# Altium PCB K10P100最小系统V1.0.PcbDoc (part 1 of 2)
Units mm, origin at the board's own origin, x right, y up, seen from the top; angles counter-clockwise.
Board outline 152.4 x 101.6 mm, 2 copper layers (Top Layer, Bottom Layer); 129 components, 121 nets, 483 pads, 257 vias.
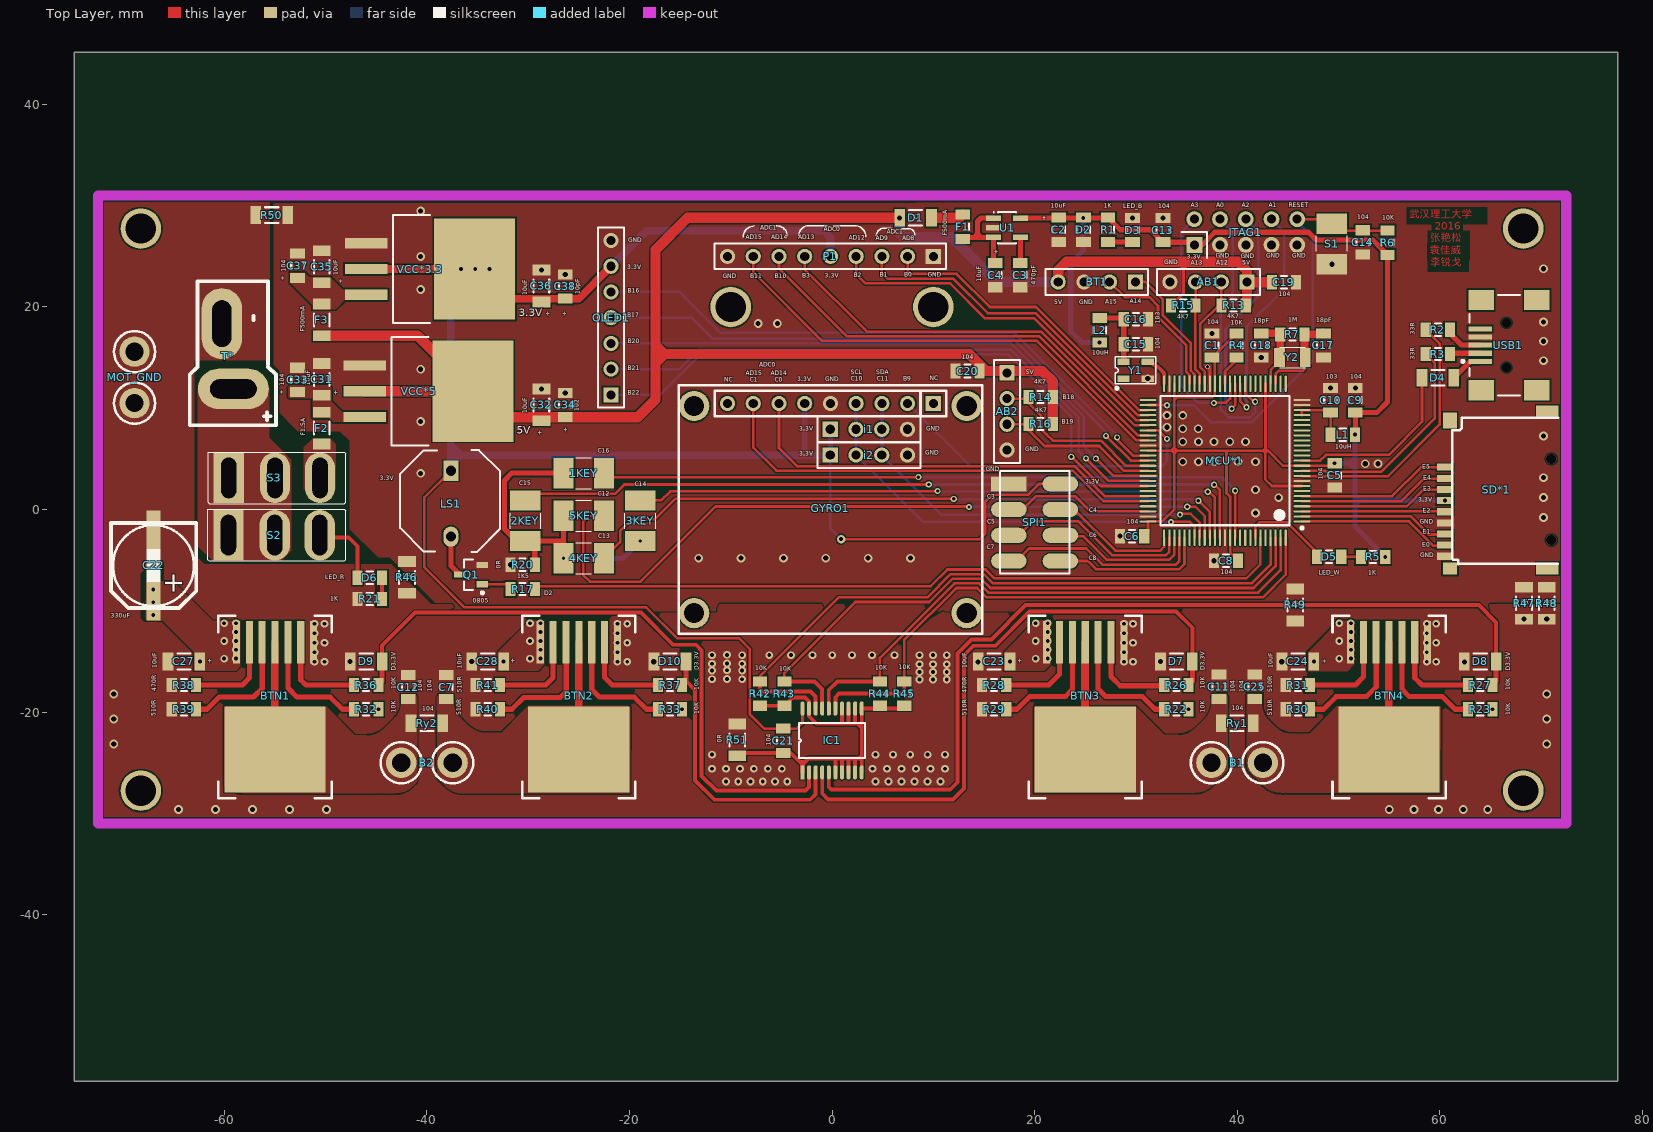
[diagram p0: Top Layer view]
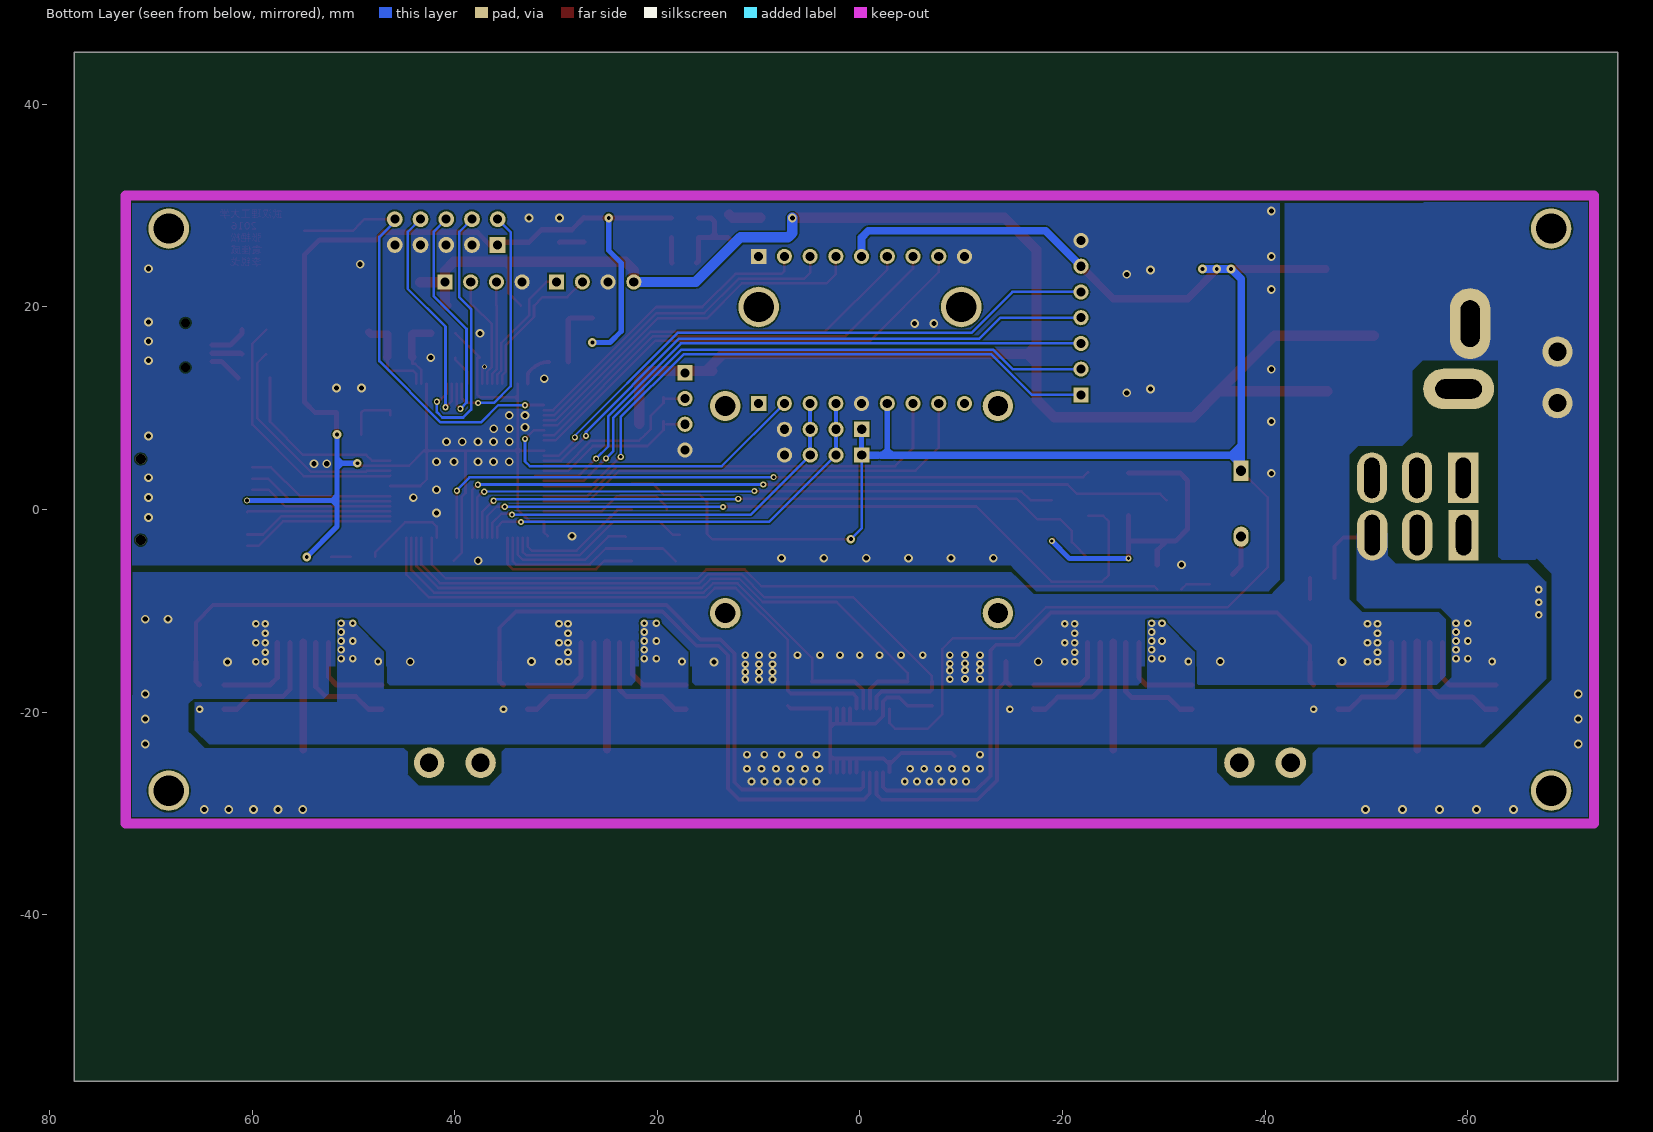
[diagram p1: Bottom Layer view, seen from below]

## Layer stack, top to bottom
Top Layer: signal copper 0.0356
Dielectric: dielectric 0.32, FR-4, Dk 4.8
Bottom Layer: signal copper 0.0356

## Board outline
-74.823,-56.45 77.577,-56.45 77.577,45.15 -74.823,45.15

## Design rules (kind name [scope] priority, off if disabled: settings)
Clearance Clearance_1 [All] p1: gap=0.152
Clearance [InNet('EGND')] p2: gap=0.381
PolygonConnect [All] p1: connectstyle=Direct reliefconductorwidth=0.254 reliefentries=4 polygonreliefangle="90 Angle" airgapwidth=0.254
RoutingVias [All] p1: holewidth=0.711 width=1.27 viastyle="Through Hole" minholewidth=0.711 minwidth=1.27 maxholewidth=0.711 maxwidth=1.27
SolderMaskExpansion [All] p1: expansion=0.102
Width [All] p1: maxlimit=1.27 minlimit=0.152 preferedwidth=0.508 minimp=50.000000 maximp=50.000000 favimp=50.000000
28 further rules are at their usual default settings.

## Classes and differential pairs
component class K10P100最小系统V1.0: C1 C2 C3 C4 C5 C6 C8 C9 C10 C13 C14 C15 C16 C17 C18 D1 D2 D3 D4 D5 F1 JTAG1 L1 L2 MCU*1 R1 R2 R3 R4 R5 R6 R7 S1 U1 USB1 Y1 Y2
component class 其他外设: 1KEY 2KEY 3KEY 4KEY 5KEY AB1 AB2 BT1 C19 C20 C21 GYRO1 i1 i2 IC1 LS1 OLED1 P1 Q1 R13 R14 R15 R16 R17 R20 R42 R43 R44 R45 R51 SD*1 SPI1 U3
component class 电机驱动: B1 B2 BTN1 BTN2 BTN3 BTN4 C7 C11 C12 C22 C23 C24 C25 C27 C28 D6 D7 D8 D9 D10 IC5 MOT_GND R21 R22 R23 R26 R27 R28 R29 R30 R31 R32 R33 R36 R37 R38 R39 R40 R41 Ry1 Ry2 S2
component class 电源: C31 C32 C33 C34 C35 C36 C37 C38 F2 F3 R46 R47 R48 R49 R50 S3 T* VCC*2 VCC*3.3 VCC*5

## Components (designator, comment, footprint, x,y, rotation, side; value= is the part's Value field where it differs from the comment)
1KEY "SW-PB" "sw 3*4 *2" -22.525,5.125 r180 top
2KEY "SW-PB" "sw 3*4 *2" -31.8,0.9 r270 top
3KEY "SW-PB" "sw 3*4 *2" -20.475,0.9 r270 top
4KEY "SW-PB" "sw 3*4 *2" -22.525,-3.3 r180 top
5KEY "SW-PB" "sw 3*4 *2" -22.525,0.913 r180 top
AB1 "Header 4" HDR1X4 40.975,22.475 r180 top
AB2 "Header 4" HDR1X4 17.275,13.5 r270 top
B1 "Motor" KF301-2P 40,-25 r0 top
B2 "Motor" KF301-2P -40,-25 r0 top
BT1 "Header 4" HDR1X4 29.95,22.475 r180 top
BTN1 "BTN7960" PG-TO263-7-1 -55,-12 r180 top
BTN2 "BTN7960" PG-TO263-7-1 -25,-12 r180 top
BTN3 "BTN7960" PG-TO263-7-1 25,-12 r180 top
BTN4 "BTN7960" PG-TO263-7-1 55,-12 r180 top
C1 "100nF" C2012 37.525,16.2 r270 top
C2 "Cap Pol1" C2012 22.375,27.625 r270 top
C3 "470pF" C2012 18.575,23.15 r90 top
C4 "10UF" C2012 16.125,23.15 r90 top
C5 "100nF" C2012 49.625,3.375 r90 top
C6 "100nF" C2012 29.625,-2.625 r0 top
C7 "Cap" C2012 -38.1,-17.525 r90 top
C8 "100nF" C2012 38.9,-5.05 r0 top
C9 "100nF" C2012 51.675,10.8 r270 top
C10 "10nF" C2012 49.225,10.8 r270 top
C11 "Cap" C2012 38.2,-17.5 r90 top
C12 "Cap" C2012 -41.85,-17.525 r90 top
C13 "100nF" C2012 32.675,27.6 r90 top
C14 "100nF" C2012 52.4,26.375 r90 top
C15 "10nF" C2012 30,16.325 r180 top
C16 "100nF" C2012 30,18.775 r180 top
C17 "18pF" C2012 48.525,16.2 r90 top
C18 "18pF" C2012 42.375,16.2 r90 top
C19 "100nF" C2012 44.625,22.45 r0 top
C20 "100nF" C2012 13.375,13.675 r180 top
C21 "100nF" C2012 -4.825,-22.825 r270 top
C22 "Cap Pol1" SMD-EC-F8 -67,-9.05 r90 top
C23 "Cap Pol1" 1206(2) 16,-15 r180 top
C24 "Cap Pol1" 1206(2) 46,-15 r180 top
C25 "Cap" C2012 41.75,-17.5 r270 top
C27 "Cap Pol1" 1206(2) -64,-15 r180 top
C28 "Cap Pol1" 1206(2) -34,-15 r180 top
C31 "Cap Pol1" 1206(2) -50.4,12.85 r90 top
C32 "Cap Pol1" 1206(2) -28.7,10.325 r90 top
C33 "Cap" C2012 -52.775,12.8 r270 top
C34 "Cap" C2012 -26.35,10.325 r270 top
C35 "Cap Pol1" 1206(2) -50.4,23.975 r90 top
C36 "Cap Pol1" 1206(2) -28.7,22.075 r90 top
C37 "Cap" C2012 -52.775,24.075 r270 top
C38 "Cap" C2012 -26.35,22.025 r270 top
D1 "Diode" 1206(2) 8.25,28.8 r0 top
D2 "1N4729A" C2012 24.825,27.625 r90 top
D3 "POWER" C2012 29.675,27.6 r90 top
D4 "Diode" 1206(2) 59.83,13.006 r180 top
D5 "POWER" C2012 49.075,-4.675 r180 top
D6 "LED" C2012 -45.65,-6.75 r0 top
D7 "1SS355" 1206(2) 34,-15 r0 top
D8 "1SS355" 1206(2) 64,-15 r0 top
D9 "1SS355" 1206(2) -46,-15 r0 top
D10 "1SS355" 1206(2) -16,-15 r0 top
F1 "300mA" R2012 12.9,27.925 r90 top
F2 "1.5A" 1206(2) -50.4,8.05 r90 top
F3 "500mA" 1206(2) -50.4,18.725 r90 top
GYRO1 "陀螺仪" landzo_AngularRate_Accelerometer_Sensor 10,10.475 r180 top
i1 "Header 4" HDR1X4 -0.175,7.925 r0 top
i2 "Header 4" HDR1X4 -0.175,5.375 r0 top
IC1 "74LVC245" "TSSOP20 74lvc245" 0,-22.775 r90 top
JTAG1 "Header 5X2" IDC5X2 40.85,27.4 r0 top
L1 "Inductor" C2012 50.425,7.4 r180 top
L2 "Inductor" C2012 26.425,17.7 r90 top
LS1 "Buzzer" ABSM-1574 -37.4,6.475 r270 top
MCU*1 "k60P100" LQFP100 38.8,4.825 r180 top
MOT_GND "Motor" KF301-2P -68.875,13.05 r90 top
OLED1 "Header 7" HDR1X7 -21.825,11.325 r90 top
P1 "Header 9" HDR1X9 10,25 r180 top
Q1 "QNPN" SOT95P240-3N -35.65,-6.425 r180 top
R1 "1K" R2012 27.25,27.625 r90 top
R2 "33R" R2012 59.825,17.75 r180 top
R3 "33R" R2012 59.825,15.35 r180 top
R4 "10K" R2012 39.95,16.2 r270 top
R5 "1K" R2012 53.425,-4.675 r0 top
R6 "10K" R2012 54.85,26.35 r270 top
R7 "1M" R2012 45.45,17.3 r180 top
R13 "Res2" R2012 39.65,20.15 r0 top
R14 "Res2" R2012 20.6,11.1 r0 top
R15 "Res2" R2012 34.675,20.15 r180 top
R16 "Res2" R2012 20.6,8.45 r0 top
R17 "Res2" R2012 -30.55,-7.85 r0 top
R20 "0R" R2012 -30.55,-5.45 r0 top
R21 "Res2" R2012 -45.65,-8.825 r0 top
R22 "Res2" R2012 34,-19.725 r0 top
R23 "Res2" R2012 64,-19.725 r180 top
R26 "Res2" R2012 34,-17.325 r180 top
R27 "Res2" R2012 64,-17.325 r0 top
R28 "Res2" R2012 16,-17.325 r0 top
R29 "Res2" R2012 16,-19.725 r0 top
R30 "Res2" R2012 46,-19.725 r0 top
R31 "Res2" R2012 46,-17.325 r0 top
R32 "Res2" R2012 -46,-19.725 r0 top
R33 "Res2" R2012 -16,-19.725 r180 top
R36 "Res2" R2012 -46,-17.325 r180 top
R37 "Res2" R2012 -16,-17.325 r0 top
R38 "Res2" R2012 -64,-17.325 r0 top
R39 "Res2" R2012 -64,-19.725 r0 top
R40 "Res2" R2012 -34,-19.725 r0 top
R41 "Res2" R2012 -34,-17.325 r0 top
R42 "Res2" R2012 -7.1,-18.175 r270 top
R43 "Res2" R2012 -4.7,-18.175 r270 top
R44 "Res2" R2012 4.725,-18.175 r270 top
R45 "Res2" R2012 7.125,-18.175 r270 top
R46 "Res2" 1206(2) -41.975,-6.7 r270 top
R47 "Res2" 1206(2) 68.325,-9.25 r270 top
R48 "Res2" 1206(2) 70.575,-9.25 r270 top
R49 "Res2" 1206(2) 45.75,-9.425 r270 top
R50 "Res2" 1206(2) -55.325,29.075 r180 top
R51 "Res2" 1206(2) -9.35,-22.75 r270 top
Ry1 "" 1206(2) 40,-21.1 r0 top
Ry2 "" 1206(2) -40,-21.1 r0 top
S1 "SW-PB" "sw 3*4 *2" 50.875,24.225 r90 top
S2 "SW-SPST" SW-125V6A(-) -59.6,-2.525 r0 top
S3 "SW-SPST" SW-125V6A(-) -59.575,3.125 r0 top
SD*1 "TF_card" SD_card 69.25,0.025 r180 top
SPI1 "Header 4X2A" "SMT head4*1" 20.125,-1.4 r0 top
T* "T头" T插 -59.525,17.075 r270 top
U1 "MIC5219" SOT-23-5 17.275,27.825 r270 top
USB1 "USB-MINI-B" USB-MINI-B 71.841,16.234 r0 top
VCC*3.3 "LM1086" "DPAK LM2940" -39.7,23.75 r0 top
VCC*5 "LM1084" "DPAK LM2940" -39.85,11.675 r0 top
Y1 "50MHZ" XTAL7_3225 29.975,13.75 r0 top
Y2 "32.768K" CT3215 46.725,15.025 r180 top

## Footprints (in the part's own frame and the unit in brackets; to place one, negate y for a bottom-side part, rotate by r counter-clockwise, add the part's x,y. Pads: shape width x height; smd on the part's side, far side on the other; paste and mask are expansions set on the pad)
1206(2) [mm]
  rect 1.05x1.75 smd: 1(-1.575,0) 2(1.575,0)
  silkscreen extent -0.65,-0.77 0.65,0.77, body extent -1.6,-0.8 1.6,0.8, height 1.6
ABSM-1574 [mm] "Magnetic Transducer Buzzer"
  rect 2x1.5 hole 1: 1A(2.65,-0.24)
  oval 2x1.5 hole 1: 2A(9.15,-0.24)
  silkscreen extent 0.6,-5.25 10.68,4.62
C2012 [mm] "Chip Capacitor, 2-Leads, Body 2.0x1.2mm, IPC Low Density"
  rect 1x1.45 smd: 1(-1.2,0) 2(1.2,0)
  silkscreen extent -0.3,-0.63 0.3,0.63, body extent -0.98,-0.6 1.02,0.6, height 0.5
CT3215 [mm]
  rect 1.05x1.85 smd: 1(0,0) 2(2.54,0)
  silkscreen extent 0,-1.02 2.54,1.02
"DPAK LM2940" [mm] "D2-PAK, 4-Pads, Body 7.93x8.69mm (max), IPC Medium Density"
  rect 4.2x1 smd: 1(-6.3,2.54) 2(-6.3,0) 3(-6.3,-2.54)
  rect 8x10 smd: 4(4.4,0)
  silkscreen extent -3.65,-5.35 0,5.35, body extent -3.65,-5.33 6,5.33, height 4.83
HDR1X4 [mm] "Connector; Header; 4 Position"
  rect 1.5x1.5 hole 0.9: 1(0,0)
  round 1.5 hole 0.9: 2(2.54,0) 3(5.08,0) 4(7.62,0)
  silkscreen extent -1.27,-1.27 8.89,1.27
HDR1X7 [mm] "Connector; Header; 7 Position"
  rect 1.5x1.5 hole 0.9: 1(0,0)
  round 1.5 hole 0.9: 2(2.54,0) 3(5.08,0) 4(7.62,0) 5(10.16,0) 6(12.7,0) 7(15.24,0)
  silkscreen extent -1.27,-1.27 16.51,1.27
HDR1X9 [mm] "Connector; Header; 9 Position"
  rect 1.5x1.5 hole 0.9: 1(0,0)
  round 1.5 hole 0.9: 2(2.54,0) 3(5.08,0) 4(7.62,0) 5(10.16,0) 6(12.7,0) 7(15.24,0) 8(17.78,0) 9(20.32,0)
  silkscreen extent -1.27,-1.27 21.59,1.27, body extent -1.27,-1.27 21.59,1.27, height 7.58
IDC5X2 [mil]
  rect 62x62 hole 35: 1(-200,-50)
  round 62 hole 35: 2(-200,50) 3(-100,-50) 4(-100,50) 5(0,-50) 6(0,50) 7(100,-50) 8(100,50) 9(200,-50) 10(200,50)
  silkscreen extent -250,-100 -150,0
KF301-2P [mm]
  round 3 hole 1.8: 1(-2.54,0) 2(2.54,0)
  silkscreen extent -4.57,-2.03 4.57,2.03
landzo_AngularRate_Accelerometer_Sensor [mm]
  round 3 hole 2: 0(-3.302,20.701) 0(-3.302,0.254) 0(23.622,20.701) 0(23.622,0.254)
  rect 1.5x1.5 hole 0.9: 1(0,0)
  round 1.5 hole 0.9: 2(2.54,0) 3(5.08,0) 4(7.62,0) 5(10.16,0) 6(12.7,0) 7(15.24,0) 8(17.78,0) 9(20.32,0)
  silkscreen extent -4.83,-1.78 25.15,22.73
LQFP100 [mm] "SQFP, 100-Leads, Body 14.00x14.00mm, Pitch 0.50mm, IPC Medium Density"
  oval 1.65x0.2 smd: 1(-7.6,6) 2(-7.6,5.5) 3(-7.6,5) 4(-7.6,4.5) 5(-7.6,4) 6(-7.6,3.5) 7(-7.6,3) 8(-7.6,2.5) 9(-7.6,2) 10(-7.6,1.5) 11(-7.6,1) 12(-7.6,0.5) 13(-7.6,0) 14(-7.6,-0.5) 15(-7.6,-1) 16(-7.6,-1.5) 17(-7.6,-2) 18(-7.6,-2.5) 19(-7.6,-3) 20(-7.6,-3.5) 21(-7.6,-4) 22(-7.6,-4.5) 23(-7.6,-5) 24(-7.6,-5.5) 25(-7.6,-6) 51(7.6,-6) 52(7.6,-5.5) 53(7.6,-5) 54(7.6,-4.5) 55(7.6,-4) 56(7.6,-3.5) 57(7.6,-3) 58(7.6,-2.5) 59(7.6,-2) 60(7.6,-1.5) 61(7.6,-1) 62(7.6,-0.5) 63(7.6,0) 64(7.6,0.5) 65(7.6,1) 66(7.6,1.5) 67(7.6,2) 68(7.6,2.5) 69(7.6,3) 70(7.6,3.5) 71(7.6,4) 72(7.6,4.5) 73(7.6,5) 74(7.6,5.5) 75(7.6,6)
  oval 0.2x1.65 smd: 26(-6,-7.6) 27(-5.5,-7.6) 28(-5,-7.6) 29(-4.5,-7.6) 30(-4,-7.6) 31(-3.5,-7.6) 32(-3,-7.6) 33(-2.5,-7.6) 34(-2,-7.6) 35(-1.5,-7.6) 36(-1,-7.6) 37(-0.5,-7.6) 38(0,-7.6) 39(0.5,-7.6) 40(1,-7.6) 41(1.5,-7.6) 42(2,-7.6) 43(2.5,-7.6) 44(3,-7.6) 45(3.5,-7.6) 46(4,-7.6) 47(4.5,-7.6) 48(5,-7.6) 49(5.5,-7.6) 50(6,-7.6) 76(6,7.6) 77(5.5,7.6) 78(5,7.6) 79(4.5,7.6) 80(4,7.6) 81(3.5,7.6) 82(3,7.6) 83(2.5,7.6) 84(2,7.6) 85(1.5,7.6) 86(1,7.6) 87(0.5,7.6) 88(0,7.6) 89(-0.5,7.6) 90(-1,7.6) 91(-1.5,7.6) 92(-2,7.6) 93(-2.5,7.6) 94(-3,7.6) 95(-3.5,7.6) 96(-4,7.6) 97(-4.5,7.6) 98(-5,7.6) 99(-5.5,7.6) 100(-6,7.6)
  silkscreen extent -7.73,-6.38 6.38,6.77, body extent -7,-7 7,7, height 1.7
PG-TO263-7-1 [mm]
  rect 0.7x4.2 smd: 1(-3.81,1.123) 2(-2.54,1.123) 3(-1.27,1.123) 4(0,1.123) 5(1.27,1.123) 6(2.54,1.123) 7(3.81,1.123)
  rect 10x8.5 smd: 8(0,11.684)
  silkscreen extent -5.59,-1.52 5.59,16.51
R2012 [mm] "Chip Resistor, 2-Leads, Body 2.0x1.2mm, IPC Low Density"
  rect 1x1.4 smd: 1(-1.2,0) 2(1.2,0)
  silkscreen extent -0.3,-0.6 0.3,0.6, body extent -0.98,-0.6 1.02,0.6, height 0.5
SD_card [mm]
  rect 1.6x0.7 smd: 1(8.732,-4.16) 2(8.732,-3.06) 3(8.732,-1.96) 4(8.732,-0.86) 5(8.732,0.24) 6(8.732,1.34) 7(8.732,2.44) 8(8.732,3.54) 9(8.732,4.64)
  rect 1.4x1.2 smd: 10(8.232,5.84)
  rect 2.2x1.2 smd: 11(-1.368,5.84) 12(-1.368,-9.66)
  rect 1.4x1.6 smd: 13(8.232,-8.76)
  silkscreen extent -2.47,-9.04 8.03,5.43
SMD-EC-F8 [mm]
  rect 3.8x1.4 smd: 1(0,0) 2(7.051,0)
  silkscreen extent -0.69,-4.22 7.71,4.2
"SMT head4*1" [mm]
  rect 3.5x1.5 smd: 1(-2.667,3.937)
  oval 3.5x1.5 smd: 2(-2.667,1.397) 3(-2.667,-1.143) 4(-2.667,-3.683) 5(2.413,3.937) 6(2.413,1.397) 7(2.413,-1.143) 8(2.413,-3.683)
  silkscreen extent -3.56,-4.93 3.3,5.23
SOT95P240-3N [mm] "SOT23, 3-Leads, Body 2.9x1.3mm, Pitch 0.95mm, Lead Span 2.4mm, IPC Medium Density"
  rect 1.15x0.6 smd: 1(-1.125,0.95) 2(-1.125,-0.95) 3(1.125,0)
  silkscreen extent -1.25,-1.5 0.7,1.92, body extent -0.7,-1.5 0.7,1.5, height 1.14
SOT-23-5 [mm] "SOT-23/SC-74A; 5 Leads; Body 3.1 x 3 mm, inc. leads (LxW max)"
  rect 0.55x1.45 smd: 1(-0.95,-1.329) 2(0,-1.329) 3(0.95,-1.329) 4(0.95,1.329) 5(-0.95,1.329)
  silkscreen extent -1.57,-1.35 1.55,0.9
"sw 3*4 *2" [mm]
  rect 2x3 smd: 1(0,1.524) 2(4,1.524)
  silkscreen extent 1.27,0 2.79,3.05
SW-125V6A(-) [mm]
  rect 3x5 hole 1.5 slot 4 at 90 deg: 0(0,0)
  oval 3x5 hole 1.5 slot 4 at 90 deg: 1(4.572,0) 2(9.017,0)
  silkscreen extent -2.03,-2.54 11.56,2.54
"TSSOP20 74lvc245" [mm]
  rect 1.4x0.4 smd: 1(-3.175,2.921)
  oval 1.4x0.4 smd: 2(-3.175,2.271) 3(-3.175,1.621) 4(-3.175,0.971) 5(-3.175,0.321) 6(-3.175,-0.329) 7(-3.175,-0.979) 8(-3.175,-1.629) 9(-3.175,-2.279) 10(-3.175,-2.929) 11(3.125,-2.929) 12(3.125,-2.279) 13(3.125,-1.629) 14(3.125,-0.979) 15(3.125,-0.329) 16(3.125,0.321) 17(3.125,0.971) 18(3.125,1.621) 19(3.125,2.271) 20(3.125,2.921)
  silkscreen extent -1.74,-3.25 1.69,3.25
T插 [mm]
  oval 4x7 hole 1.9 slot 4.6 at 90 deg: 1(5.161,0.416)
  oval 7x4 hole 1.9 slot 4.6 at 0 deg: 2(-1.283,-0.727)
  silkscreen extent -5.46,-3.9 8.75,4.61
USB-MINI-B [mm] "Connector; USB2.0, Type A, SM; 5 Position; Right Angle"
  rect 2.3x0.5 smd: 1(-7.85,-1.6) 2(-7.85,-0.8) 3(-7.85,0) 4(-7.85,0.8) 5(-7.85,1.6)
  rect 2.5x2 smd: 6(-7.75,4.45) 7(-2.25,4.45) 8(-7.75,-4.45) 9(-2.25,-4.45)
  round 0.6 hole 0.9 unplated: MH1(-5.25,2.2) MH2(-5.25,-2.2)
  silkscreen extent -9.67,-4.95 -3.9,4.95, body extent -8.55,-5.35 0.65,5.35, height 3.95
XTAL7_3225 [mil]
  rect 47.2x25.6 smd: 1(-47.25,-32.5) 2(47.25,-32.5) 3(47.25,32.5) 4(-47.25,32.5)
  silkscreen extent -79,-75 79,53

## Part data
1KEY 2KEY 3KEY 4KEY 5KEY S1: "Switch"
AB1 AB2 BT1 i1 i2: "Header, 4-Pin"
B1 B2 MOT_GND: "Motor, General Kind"
C1 C4 C5 C6 C8 C9 C10 C13 C14 C15 C16 C19 C20 C21: library part Cap, "Capacitor"
C2 C22 C23 C24 C27 C28 C31 C32 C35 C36: "Polarized Capacitor (Radial)"
C3 C17 C18: library part 陶瓷电容, "CAP"
C7 C11 C12 C25: "Capacitor"
C33 C34 C37 C38: "贴片电容"
D1 D4: "Default Diode"
D2 D7 D8 D9 D10: library part "Diode 1N4148", "High Conductance Fast Diode"
D3 D5: library part LED, "Typical INFRARED GaAs LED"
D6: "Typical INFRARED GaAs LED"
F1 F2 F3: library part "Fuse 1", "Fuse"
GYRO1: library part "Header 9", "Header, 8-Pin"
JTAG1: "Header, 5-Pin, Dual row"
LS1: "Magnetic Transducer Buzzer"
OLED1: "Header, 7-Pin"
P1: "Header, 9-Pin"
Q1: "NPN Bipolar Transistor"
R1 R4 R5 R20: library part Res, "Resistor of led"
R2 R3: library part Res, "贴片电阻"
R6 R7 Ry1 Ry2: library part Res, "Resistor"
R13 R14 R15 R16 R17 R21 R22 R23 R26 R27 R28 R29 R30 R31 R32 R33 R36 R37 R38 R39 R40 R41 R42 R43 R44 R45 R46 R47 R48 R49 R50 R51: "Resistor"
S2 S3: "Single-Pole, Single-Throw Switch"
SPI1: "Header, 4-Pin, Dual row"
T*: library part Tͷ
U1: "LDO"
USB1: "USB 2.0, Right Angle, SMT, A Type, Receptacle, 5 Position, Black"
VCC*5: library part LM1086
Y1: library part XTAL1
Y2: library part XTAL, "Crystal Oscillator"

## Free pads (board coordinates)
  round 4 hole 3: 0(68.25,-27.75) 1(-68.25,-27.75) 2(-68.25,27.75) 3(68.25,27.75) 4(-10,20) 5(10,20)

## Via types
v1: diameter 0.762, hole 0.381, Top Layer to Bottom Layer, 136 vias
v2: diameter 0.864, hole 0.508, Top Layer to Bottom Layer, 83 vias
v3: diameter 0.61, hole 0.33, Top Layer to Bottom Layer, 25 vias
v4: diameter 0.864, hole 0.381, Top Layer to Bottom Layer, 9 vias
v5: diameter 1, hole 1, Top Layer to Bottom Layer, 2 vias
v6: diameter 0.457, hole 0.3, Top Layer to Bottom Layer, 1 vias
v7: diameter 0.61, hole 0.381, Top Layer to Bottom Layer, 1 vias

## Nets (pads, with @x,y where several pads share a name; then routed paths per layer and width w, separated by ;. In a path a pad name is that pad's centre, name@x,y a point inside that pad or via, vN(x,y) a via of type N, cw(c..) or ccw(c..) an arc to the next point about the centre after c; other vN are vias at no path point)
3.3V: C21.1 C36.1 C38.2 GYRO1.6 i1.1 i2.1 IC1.20 LS1.1A OLED1.6 P1.5 SPI1.5 VCC*3.3.2 VCC*3.3.4 | length 219
  Top Layer w0.254: LS1.1A@-37.64,3.825 -40.25,1.215 -40.25,-5.7 -36.296,-9.654 -18.346,-9.654 -15.275,-12.725 -9.152,-12.725 -8.13,-13.746 -8.13,-20.205 -6.71,-21.625 C21.1@-4.825,-21.625 -3.45,-21.625 -2.921,-21.096 IC1.20@-2.921,-19.65 ; i2.1@-0.175,5.375 i2.1@-0.16,5.39 ; v4@0.925,-2.95 14.55,-2.95 15.1,-2.4 15.1,0.75 15.807,1.457 19.345,1.457 20.425,2.537 SPI1.5@22.538,2.537
  Top Layer w0.762: VCC*3.3.2@-46,23.75 v4(-36.65,23.75) VCC*3.3.4@-35.3,23.75 -32.375,20.825 C38.2@-26.35,20.825 -25.025,20.825 OLED1.6@-21.825,24.025
  Bottom Layer w0.254: -37.64,5.35 -37.615,5.375 ; i2.1@-0.175,5.375 -0.175,-1.85 v4(0.9,-2.925)
  Bottom Layer w0.508: -3.55,5.375 -3.275,5.375 -2.7,5.95 ; -2.725,5.375 -2.7,5.4 -2.7,5.95 ; GYRO1.6@-2.7,10.475 -2.7,5.95 ; -1.775,5.375 -2.125,5.375 -2.7,5.95 ; i2.1@-0.16,5.39 i1.1@-0.16,7.925
  Bottom Layer w0.762: LS1.1A@-37.64,3.825 LS1.1A@-37.64,4.41 ; -37.615,5.375 -36.675,5.375 ; v4(-33.825,23.75) v4(-35.238,23.75) v4(-36.65,23.75) -37.64,22.76 -37.64,6.25 ; OLED1.6@-21.825,24.025 -18.325,27.525 -0.825,27.525 -0.16,26.86 P1.5@-0.16,25 ; -3.55,5.375 -36.675,5.375 ; -3.275,5.375 -2.725,5.375 -2.125,5.375 ; -1.775,5.375 i2.1@-0.175,5.375 ; LS1.1A@-37.64,4.41 -37.64,5.35 -37.64,6.25 ; LS1.1A@-37.64,4.41 -36.675,5.375 ; -37.64,6.25 -37.55,6.25 -36.675,5.375
5V: AB1.1 AB2.1 BT1.4 C19.1 C20.1 C32.1 C34.2 D1.1 F3.1 R13.2 R14.2 R15.2 R16.2 VCC*5.2 VCC*5.4 | length 190.3
  Top Layer w0.254: R15.2@33.475,20.15 34.7,21.375 34.7,23.775 ; 34.4,24.575 34.4,24.475 ; 35.075,24.475 35.075,24.15 34.7,23.775 ; 34.4,24.475 34.4,24.075 34.7,23.775 ; 34.4,24.475 34.7,24.175 34.7,23.775
  Top Layer w1.016: F3.1@-50.725,17.15 -40.925,17.15 VCC*5.4@-35.45,11.675 ; VCC*5.2@-46.15,11.675 VCC*5.4@-35.45,11.675 ; v2(6.675,28.8) -14.275,28.8 -17.425,25.65 -17.425,16.2 ; C20.1@14.575,13.675 AB2.1@17.1,13.675 ; AB2.1@17.275,13.5 AB2.1@17.1,13.675 ; R16.2@21.8,8.45 R14.2@21.8,11.1 21.8,12.65 20.775,13.675 AB2.1@17.1,13.675 ; BT1.4@22.33,22.475 22.33,23.655 23.15,24.475 34.4,24.475 35.075,24.475 40.1,24.475 40.975,23.6 AB1.1@40.975,22.475 ; R13.2@40.85,20.15 40.975,20.275 AB1.1@40.975,22.475 ; C19.1@43.425,22.45 41,22.45 AB1.1@40.975,22.475 ; VCC*5.4@-35.45,11.675 -32.9,9.125 C34.2@-26.35,9.125 -19.2,9.125 -17.425,10.9 -17.425,14.5 ; -17.425,14.5 -17.425,15.35 ; -17.425,14.5 -16.575,15.35 ; -17.425,15.35 -16.575,15.35 ; -17.425,15.35 -17.425,16.2 ; -17.425,16.2 -16.575,15.35 ; -16.575,15.35 13.55,15.35 15.225,13.675 AB2.1@17.1,13.675
  Bottom Layer w1.016: v2(6.675,28.8) 6.675,27.3 7.1,26.875 11.8,26.875 16.2,22.475 BT1.4@22.33,22.475
"BT RXD": BT1.1 MCU*1.44 | length 13.1
  Top Layer w0.254: BT1.1@29.95,22.475 30.95,22.475 32.645,20.78 32.645,19.23 35.418,16.457 35.418,13.732 35.8,13.35 MCU*1.44@35.8,12.425
"BT TXD": BT1.2 MCU*1.45 | length 14.7
  Top Layer w0.254: BT1.2@27.41,22.475 28.91,20.975 31.325,20.975 32.188,20.112 32.188,19.012 34.961,16.239 34.961,13.615 35.3,13.275 MCU*1.45@35.3,12.425
CE: MCU*1.73 SPI1.2 | length 13.5
  Top Layer w0.254: SPI1.2@19.083,-0.003 19.083,0.283 20.125,1.325 24,1.325 25.5,-0.175 MCU*1.73@31.2,-0.175
DGND: 1KEY.2 2KEY.2 3KEY.2 4KEY.2 5KEY.2 R20.2 | length 33.6
  Top Layer w0.254: 2KEY.2@-31.126,-3.125 2KEY.2@-30.276,-3.125 ; 3KEY.2@-19.142,-2.909 v3(-18.951,-3.1)
  Top Layer w0.508: R20.2@-29.35,-5.45 -29.35,-4.026 2KEY.2@-30.276,-3.1 ; v3(-26.525,-4.824) -26.525,-3.15 ; 5KEY.2@-26.525,-0.611 -26.525,-3.15 ; 1KEY.2@-26.525,3.601 -31.624,3.601 -32.35,2.875 -32.35,-1.925 -31.175,-3.1 2KEY.2@-30.276,-3.1 ; 2KEY.2@-30.276,-3.1 -26.575,-3.1 -26.525,-3.15
  Bottom Layer w0.508: v3(-26.525,-4.824) -20.675,-4.824 v3(-18.951,-3.1)
EGND: BTN1.1 BTN2.1 BTN3.1 BTN4.1 C7.2 C11.2 C12.2 C22.2 C23.2 C24.2 C25.1 C27.2 C28.2 D7.1 D8.1 D9.1 D10.1 MOT_GND.1 MOT_GND.2 R21.1 R28.1 R29.1 R30.1 R31.1 R38.1 R39.1 R40.1 R41.1 R46.2 R47.2 R48.2 R49.2 R50.2 R51.1 T*.2
  other v1: -10.475,-26.85 -9.265,-26.85 -8.055,-26.85 -6.845,-26.85 -5.635,-26.85 -4.425,-26.85 4.3,-26.85 5.58,-26.85 6.86,-26.85 8.14,-26.85 9.42,-26.85 10.7,-26.85 -11.86,-25.6 -10.48,-25.6 -9.1,-25.6 -7.72,-25.6 -6.34,-25.6 -4.96,-25.6 3.99,-25.6 5.422,-25.6 6.854,-25.6 8.286,-25.6 9.718,-25.6 11.15,-25.6 -11.85,-24.2 4.3,-24.2 6.012,-24.2 7.725,-24.2 9.437,-24.2 11.15,-24.2 8.625,-16.775 9.975,-16.775 11.325,-16.775 -11.85,-16.75 -8.875,-16.751 -10.375,-16.725 8.625,-16.05 9.975,-16.05 11.325,-16.05 -11.85,-15.9 -8.875,-15.9 -10.375,-15.875 8.625,-15.275 9.975,-15.275 11.325,-15.275 -11.85,-15.225 -8.875,-15.225 -10.375,-15.2 -51.1,-15.025 -50.125,-15.025 -21.2,-15.025 -20.225,-15.025 28.825,-15.025 29.725,-15.025 58.725,-15.025 59.65,-15.025 -11.85,-14.375 -8.875,-14.375 -6.2,-14.375 -4.05,-14.375 -1.941,-14.375 0.019,-14.375 1.978,-14.375 3.937,-14.375 6.175,-14.375 8.625,-14.375 9.975,-14.375 11.325,-14.375 -10.375,-14.35 -51.1,-14.088 -21.2,-14.088 28.825,-14.088 58.725,-14.088 -51.1,-13.15 -50.125,-13.15 -21.2,-13.15 -20.225,-13.15 28.825,-13.15 29.725,-13.15 58.725,-13.15 59.65,-13.15 -51.1,-12.213 -21.2,-12.213 28.825,-12.213 58.725,-12.213 -51.1,-11.275 -50.125,-11.275 -21.2,-11.275 -20.225,-11.275 28.825,-11.275 29.725,-11.275 58.725,-11.275 59.65,-11.275
  other v2: -64.525,-29.625 -60.875,-29.625 -57.225,-29.625 -53.575,-29.625 -49.925,-29.625 55.025,-29.625 57.456,-29.625 59.888,-29.625 62.319,-29.625 64.75,-29.625 -70.925,-23.15 70.575,-23.15 -70.925,-20.687 70.575,-20.687 -70.925,-18.225 70.575,-18.225 14.4,-15.05 62.45,-15.05 -17.6,-15.025 44.4,-15.025 -47.6,-15 -35.575,-15 32.425,-15 68.325,-10.825 70.575,-10.825
GND: AB1.4 AB2.4 BT1.3 C1.1 C2.2 C3.1 C4.1 C5.1 C6.1 C8.1 C9.1 C10.1 C13.2 C14.1 C15.1 C16.1 C17.1 C18.1 C19.2 C20.2 C31.2 C32.2 C33.1 C34.1 C35.2 C36.2 C37.1 C38.1 D2.1 D3.2 GYRO1.5 i1.4 i2.4 JTAG1.3 JTAG1.5 JTAG1.7 JTAG1.9 MCU*1.9 MCU*1.24 MCU*1.25 MCU*1.41 MCU*1.49 MCU*1.60 MCU*1.74 MCU*1.88 OLED1.7 P1.1 P1.9 Q1.2 R20.1 R46.1 R47.1 R48.1 R49.1 R50.1 S1.1 SD*1.6 SD*1.9 SPI1.1 U1.2 USB1.4 VCC*3.3.1 VCC*5.1 Y1.2 | length 1.8
  Top Layer w0.254: v6(37.077,14.101) 37.077,14.073 37.3,13.85 MCU*1.41@37.3,12.425
  other v2: -31.75,-5.45 37.7,-5.05 -13.175,-4.8 -8.99,-4.8 -4.805,-4.8 -0.62,-4.8 3.565,-4.8 7.75,-4.8 28.425,-2.625 70.25,-0.775 41.8,-0.35 44.1,1.175 70.25,1.187 41.8,1.95 70.25,3.15 -40.625,3.575 52.65,4.525 53.9,4.525 34.625,4.725 36.175,4.725 37.725,4.725 40.075,4.725 41.8,4.725 34.625,6.7 36.175,6.7 37.725,6.7 39.275,6.7 40.825,6.7 70.25,7.25 34.625,7.975 36.163,7.975 33.075,8.125 -40.625,8.7 33.075,9.3 34.625,9.3 -26.35,11.525 -28.7,11.9 49.225,12 51.675,12 31.175,12.925 -40.625,13.85 70.25,14.7 42.375,15 70.25,16.612 37.525,17.4 -7.3,18.375 -5.4,18.375 70.25,18.525 -40.625,21.725 -26.35,23.225 -28.7,23.65 70.25,23.775 49.351,24.225 -40.625,24.975 29.675,28.8 32.675,28.8 -40.625,29.475
GND1: C21.2 IC1.1 IC1.6 IC1.7 IC1.8 IC1.9 IC1.10 IC1.11 IC1.12 IC1.13 IC1.14 IC1.19 R42.2 R43.2 R44.2 R45.2 R51.2 | length 48.5
  Top Layer w0.381: R51.2@-9.35,-24.325 -9.05,-24.025 C21.2@-4.825,-24.025 -4.074,-24.025 -3.175,-24.924 ; R42.2@-7.1,-19.375 R43.2@-4.7,-19.375 -3.881,-18.556 -2.675,-18.556 -2.271,-18.96 IC1.19@-2.271,-19.65 -2.271,-20.411 -1.532,-21.15 0.95,-21.15 ; IC1.1@-2.916,-25.945 -2.916,-25.183 ; -2.641,-24.909 -2.656,-24.924 ; IC1.6@0.329,-25.95 0.329,-24.771 0.5,-24.6 ; IC1.7@0.979,-25.95 0.979,-24.679 0.9,-24.6 ; IC1.14@0.979,-19.65 0.979,-21.121 0.95,-21.15 ; IC1.8@1.629,-25.95 1.629,-24.629 1.6,-24.6 ; IC1.13@1.629,-19.65 1.629,-21.129 1.65,-21.15 ; IC1.9@2.279,-25.95 2.279,-24.654 2.225,-24.6 ; IC1.12@2.279,-19.65 2.279,-21.146 2.275,-21.15 ; IC1.10@2.929,-25.95 2.929,-24.804 ; R45.2@7.125,-19.375 6.85,-19.65 IC1.11@2.929,-19.65 2.929,-21.225 ; -3.175,-24.924 -2.916,-25.183 ; -3.175,-24.924 -2.656,-24.924 ; -2.916,-25.183 -2.656,-24.924 ; -2.656,-24.924 -2.332,-24.6 0.5,-24.6 ; 0.5,-24.6 0.9,-24.6 ; 0.9,-24.6 1.6,-24.6 ; 0.95,-21.15 1.65,-21.15 ; 1.6,-24.6 2.225,-24.6 ; 1.65,-21.15 2.275,-21.15 ; 2.225,-24.6 2.629,-24.6 ; 2.275,-21.15 2.5,-21.15 ; 2.5,-21.15 2.929,-21.579 ; 2.5,-21.15 2.854,-21.15 2.929,-21.225 ; 2.629,-24.6 2.725,-24.6 2.929,-24.804 ; 2.629,-24.6 2.929,-24.3 ; 2.929,-24.804 2.929,-24.3 ; 2.929,-24.3 2.929,-21.579 ; 2.929,-21.579 2.929,-21.225
IRQ: MCU*1.80 SPI1.8 | length 15.4
  Top Layer w0.254: SPI1.8@22.538,-5.083 25.253,-5.083 26.059,-5.889 34.286,-5.889 34.8,-5.375 MCU*1.80@34.8,-2.775
K3.3V: C1.2 C2.1 C5.2 C6.2 C8.2 C9.2 C13.1 D2.2 JTAG1.1 L1.1 L2.1 MCU*1.8 MCU*1.12 MCU*1.30 MCU*1.40 MCU*1.48 MCU*1.61 MCU*1.75 MCU*1.89 R1.2 R4.1 R5.2 R6.2 SD*1.4 U1.5 | length 177
  Top Layer w0.254: C6.2@30.825,-2.625 31.2,-2.25 MCU*1.75@31.2,-1.175 32.6,-1.175 33.8,0.025 33.8,5.525 ; MCU*1.61@31.2,5.825 33.5,5.825 ; MCU*1.48@33.8,12.425 33.8,11.325 ; R4.1@39.95,17.4 39.925,17.4 C1.2@37.525,15 37.75,15 37.8,14.95 MCU*1.40@37.8,12.425 37.8,11.375 37.534,11.109 37.458,11.109 37.424,11.075 34.05,11.075 ; C8.2@40.1,-5.05 39.3,-4.25 MCU*1.89@39.3,-2.775 39.3,1.275 38.95,1.625 38.95,5.825 ; 42.775,5.95 42.775,5.825 ; MCU*1.30@42.8,12.425 42.8,6.05 ; MCU*1.8@46.4,2.325 43.425,2.325 42.775,2.975 42.775,5.575 ; v4(49.625,4.575) 49.375,4.325 MCU*1.12@46.4,4.325 44.525,4.325 43.025,5.825 ; v4(51.625,7.4) ccw(c51.504,7.521) L1.1@51.675,7.521 ; 33.5,5.825 33.8,6.125 ; 33.5,5.825 33.8,5.825 ; 33.5,5.825 33.8,5.525 ; 33.8,5.525 33.8,5.55 ; 33.8,5.55 34.075,5.825 ; 33.8,5.55 33.8,5.825 ; 33.8,5.825 33.8,6.1 ; 33.8,5.825 34.075,5.825 ; 33.8,6.1 33.8,6.125 ; 33.8,6.1 34.075,5.825 ; 33.8,6.125 33.8,10.9 ; 33.8,10.9 33.875,10.9 34.05,11.075 ; 33.8,10.9 33.8,11.325 ; 33.8,11.325 34.05,11.075 ; 34.075,5.825 38.95,5.825 ; 38.95,5.825 42.55,5.825 ; 42.55,5.825 42.775,5.6 ; 42.55,5.825 42.775,5.825 ; 42.55,5.825 42.775,6.05 42.8,6.05 ; 42.775,5.575 42.775,5.6 ; 42.775,5.575 43.025,5.825 ; 42.775,5.6 42.775,5.825 ; 42.775,5.825 42.8,5.825 ; 42.8,5.825 43.025,5.825 ; 42.8,5.825 42.8,6.05 ; 42.8,6.05 43.025,5.825
  Top Layer w0.508: U1.5@18.604,28.775 27.2,28.775 R1.2@27.25,28.825 28.45,27.625 31.45,27.625 C13.1@32.675,26.4 35.5,26.4 JTAG1.1@35.77,26.13 36.55,26.13 37.794,27.375 47.055,27.375 47.812,26.618 53.382,26.618 R6.2@54.85,25.15 54.85,10.625 53.825,9.6 C9.2@51.675,9.6 L1.1@51.675,7.521
  Bottom Layer w0.508: v4(24.8,28.8) 24.8,25.575 23.575,24.35 23.575,17.6 24.675,16.5 v4(26.425,16.5) ; v4(49.625,4.575) 51.15,4.575 ; v4(51.625,7.4) 51.625,5.05 ; v4(54.625,-4.675) 51.625,-1.675 51.625,0.425 ; v7(60.525,0.9) 52.1,0.9 ; 51.15,4.575 51.625,4.1 ; 51.15,4.575 51.625,4.575 ; 51.15,4.575 51.625,5.05 ; 51.625,0.425 51.625,0.925 ; 51.625,0.425 52.1,0.9 ; 51.625,0.925 51.625,1.375 ; 51.625,0.925 51.65,0.9 52.1,0.9 ; 51.625,1.375 51.625,4.1 ; 51.625,1.375 52.1,0.9 ; 51.625,4.1 51.625,4.575 ; 51.625,4.575 51.625,5.05
K5V: C4.2 F1.1 U1.1 U1.3 | length 9.9
  Top Layer w0.508: F1.1@12.9,26.725 13.05,26.875 14.05,26.875 ; U1.1@15.946,28.775 14.7,28.775 14.375,28.45 14.375,27.2 ; C4.2@16.125,24.35 15.946,24.529 U1.3@15.946,26.875 14.7,26.875 ; 14.05,26.875 14.375,27.2 ; 14.05,26.875 14.4,26.875 ; 14.375,27.2 14.375,26.9 14.4,26.875 ; 14.375,27.2 14.7,26.875 ; 14.4,26.875 14.7,26.875
KEY1: 1KEY.1 MCU*1.90 | length 67.8
  Top Layer w0.254: 1KEY.1@-22.55,3.701 -22.525,3.701 -22.024,3.2 v3(8.525,3.2) ; MCU*1.90@39.8,-2.775 v3(39.8,1.85)
  Bottom Layer w0.254: v3@8.525,3.175 38.575,3.175 39.8,1.95 v3(39.8,1.85)
KEY2: 2KEY.1 MCU*1.87 | length 74.3
  Top Layer w0.254: 2KEY.1@-30.276,0.9 -29.626,1.55 -21.425,1.55 -20.5,2.475 v3(9.55,2.475) ; v3(37.725,2.45) 37.725,2.525 38.3,1.95 MCU*1.87@38.3,-2.775
  Bottom Layer w0.254: v3(9.55,2.475) v3@37.725,2.475
KEY3: 3KEY.1 MCU*1.86 | length 61.3
  Top Layer w0.254: 3KEY.1@-18.951,0.9 -16.875,0.9 -15.975,1.8 v3@10.425,1.8 ; v3@37.1,1.625 37.35,1.625 37.8,1.175 MCU*1.86@37.8,-2.775
  Bottom Layer w0.254: v3(10.425,1.825) v3(37.1,1.75)
KEY4: 4KEY.1 MCU*1.85 | length 65.9
  Top Layer w0.254: 4KEY.1@-22.525,-4.824 -20.925,-3.224 -20.925,-2.107 -19.793,-0.975 -17.525,-0.975 -15.5,1.05 v3(12.025,1.05) ; v3(36.175,0.875) 37.3,-0.25 MCU*1.85@37.3,-2.775
  Bottom Layer w0.254: v3@12.05,1.025 36.025,1.025 v3(36.175,0.875)
KEY5: 5KEY.1 MCU*1.84 | length 74.8
  Top Layer w0.254: 5KEY.1@-22.525,-0.611 -24.011,-0.611 -24.575,-1.175 -24.575,-6.45 -23.907,-7.118 -18.918,-7.118 -11.5,0.3 v3@13.525,0.3 ; v3(35.075,0.275) 35.875,0.275 36.8,-0.65 MCU*1.84@36.8,-2.775
  Bottom Layer w0.254: v3(13.525,0.25) v3(35.075,0.275)
MISO: MCU*1.79 SPI1.4 | length 19.8
  Top Layer w0.254: SPI1.4@18.175,-5.125 19.45,-3.85 25.1,-3.85 26.682,-5.432 33.943,-5.432 34.3,-5.075 MCU*1.79@34.3,-2.775
MOSI: MCU*1.78 SPI1.7 | length 13.5
  Top Layer w0.254: SPI1.7@23.15,-2.675 23.175,-2.65 24.825,-2.65 27.15,-4.975 33.25,-4.975 33.8,-4.425 MCU*1.78@33.8,-2.775
NetBTN1_2: BTN1.2 R36.2 | length 9.2
  Top Layer w0.508: BTN1.2@-52.46,-13.123 -52.46,-16.815 -51.95,-17.325 R36.2@-47.2,-17.325
NetBTN1_3: BTN1.3 R32.1 | length 11.9
  Top Layer w0.508: BTN1.3@-53.73,-13.123 -53.73,-17.62 -52.825,-18.525 -49.55,-18.525 -48.35,-19.725 R32.1@-47.2,-19.725
NetBTN1_5: BTN1.5 R39.2 | length 11.9
  Top Layer w0.508: R39.2@-62.8,-19.725 -61.725,-19.725 -60.5,-18.5 -57.125,-18.5 -56.27,-17.645 BTN1.5@-56.27,-13.123
NetBTN1_6: BTN1.6 R38.2 | length 9.1
  Top Layer w0.508: R38.2@-62.8,-17.325 -58.225,-17.325 -57.54,-16.64 BTN1.6@-57.54,-13.123
NetBTN2_2: BTN2.2 R37.1 | length 9
  Top Layer w0.508: BTN2.2@-22.46,-13.123 -22.46,-16.565 -21.7,-17.325 R37.1@-17.2,-17.325
NetBTN2_3: BTN2.3 R33.2 | length 12.1
  Top Layer w0.508: BTN2.3@-23.73,-13.123 -23.73,-17.77 -22.975,-18.525 -19.525,-18.525 -18.325,-19.725 -17.175,-19.725 R33.2@-17.125,-19.675
NetBTN2_5: BTN2.5 R40.2 | length 12.1
  Top Layer w0.508: R40.2@-32.8,-19.725 -31.625,-19.725 -30.475,-18.575 -26.85,-18.575 -26.25,-17.975 -26.25,-13.143 BTN2.5@-26.27,-13.123
NetBTN2_6: BTN2.6 R41.2 | length 9
  Top Layer w0.508: R41.2@-32.8,-17.325 -28.275,-17.325 -27.54,-16.59 BTN2.6@-27.54,-13.123
NetBTN3_2: BTN3.2 R26.2 | length 9
  Top Layer w0.508: BTN3.2@27.54,-13.123 27.54,-16.49 28.45,-17.4 32.725,-17.4 R26.2@32.8,-17.325
NetBTN3_3: BTN3.3 R22.1 | length 11.9
  Top Layer w0.508: BTN3.3@26.27,-13.123 26.27,-17.695 27.025,-18.45 30.625,-18.45 31.9,-19.725 R22.1@32.8,-19.725
NetBTN3_5: BTN3.5 R29.2 | length 12
  Top Layer w0.508: R29.2@17.2,-19.725 18.25,-19.725 19.5,-18.475 23.025,-18.475 23.73,-17.77 BTN3.5@23.73,-13.123
NetBTN3_6: BTN3.6 R28.2 | length 8.8
  Top Layer w0.508: R28.2@17.2,-17.325 21.4,-17.325 22.46,-16.265 BTN3.6@22.46,-13.123
NetBTN4_2: BTN4.2 R27.1 | length 9
  Top Layer w0.508: BTN4.2@57.54,-13.123 57.54,-16.615 58.25,-17.325 R27.1@62.8,-17.325
NetBTN4_3: BTN4.3 R23.2 | length 12
  Top Layer w0.508: BTN4.3@56.27,-13.123 56.27,-17.745 57,-18.475 60.275,-18.475 61.525,-19.725 R23.2@62.8,-19.725
NetBTN4_5: BTN4.5 R30.2 | length 11.8
  Top Layer w0.508: R30.2@47.2,-19.725 48.525,-19.725 49.775,-18.475 52.75,-18.475 53.73,-17.495 BTN4.5@53.73,-13.123
NetBTN4_6: BTN4.6 R31.2 | length 9
  Top Layer w0.508: R31.2@47.2,-17.325 51.675,-17.325 52.46,-16.54 BTN4.6@52.46,-13.123
NetC3_2: C3.2 U1.4 | length 2.5
  Top Layer w0.508: C3.2@18.575,24.35 18.604,24.379 U1.4@18.604,26.875
NetC10_2: C10.2 L1.2 MCU*1.22 MCU*1.23 | length 5.6
  Top Layer w0.254: MCU*1.22@46.4,9.325 MCU*1.23@46.4,9.825 48.682,9.825 cw(c48.682,9.057) C10.2@49.225,9.6 L1.2@49.225,7.4
NetC15_2: C15.2 C16.2 L2.2 Y1.4 | length 6.6
  Top Layer w0.508: L2.2@26.425,18.9 28.498,18.9 cw(c28.498,18.473) C16.2@28.8,18.775 C15.2@28.8,16.325 28.8,14.636 cw(c28.714,14.636) Y1.4@28.775,14.576
NetC17_2: C17.2 MCU*1.28 R7.1 Y2.1 | length 9.4
  Top Layer w0.254: MCU*1.28@43.8,12.425 43.8,13.375 44.15,13.725 46.5,13.725 46.65,13.875 46.65,14.95 Y2.1@46.725,15.025
  Top Layer w0.762: Y2.1@46.725,15.025 46.65,15.1 R7.1@46.65,17.3 48.275,17.3 C17.2@48.475,17.5
NetC18_2: C18.2 MCU*1.29 R7.2 Y2.2 | length 7.3
  Top Layer w0.254: MCU*1.29@43.3,12.425 43.3,13.775 43.92,14.395 44.185,14.395 Y2.2@44.185,15.025
  Top Layer w0.762: C18.2@42.375,17.4 44.15,17.4 R7.2@44.25,17.3 44.25,15.09 Y2.2@44.185,15.025
NetC31_1: C31.1 C33.2 F2.2 VCC*5.3
NetC35_1: C35.1 C37.2 F3.2 VCC*3.3.3
NetD1_2: D1.2 F1.2 | length 3.2
  Top Layer w1.016: D1.2@9.825,28.8 12.575,28.8 F1.2@12.9,29.125
NetD3_1: D3.1 R1.1 | length 2.4
  Top Layer w0.508: R1.1@27.25,26.425 29.65,26.425 D3.1@29.675,26.4
NetD5_1: D5.1 R5.1 | length 2
  Top Layer w0.254: D5.1@50.275,-4.675 R5.1@52.225,-4.675
NetD6_2: D6.2 R21.2 | length 2.1
  Top Layer w0.381: R21.2@-44.45,-8.825 D6.2@-44.45,-6.75
NetD7_2: D7.2 IC1.4 R26.1 | length 60.7
  Top Layer w0.381: IC1.4@-0.971,-25.95 -0.971,-28.054 -0.4,-28.625 11.95,-28.625 13.035,-27.54 13.035,-14.391 13.976,-13.45 16.125,-13.45 19.5,-10.075 33.975,-10.075 35.575,-11.675 D7.2@35.575,-15
  Top Layer w0.508: R26.1@35.2,-17.325 35.575,-16.95 D7.2@35.575,-15
NetD8_2: D8.2 IC1.5 R27.2 | length 89.5
  Top Layer w0.381: IC1.5@-0.321,-25.95 -0.321,-27.379 -0.05,-27.65 11.675,-27.65 12.4,-26.925 12.4,-14.2 13.785,-12.815 15.735,-12.815 19.11,-9.44 63.865,-9.44 65.575,-11.15 D8.2@65.575,-15
  Top Layer w0.508: R27.2@65.2,-17.325 65.575,-16.95 D8.2@65.575,-15
NetD9_2: D9.2 IC1.2 R36.1 | length 63.7
  Top Layer w0.381: D9.2@-44.425,-15 -44.425,-13.425 -41.175,-10.175 -18.875,-10.175 -15.7,-13.35 -13.425,-13.35 -12.875,-13.9 -12.875,-26.3 -11.425,-27.75 -2.625,-27.75 -2.277,-27.401 -2.277,-25.955 IC1.2@-2.271,-25.95
  Top Layer w0.508: R36.1@-44.8,-17.325 -44.425,-16.95 D9.2@-44.425,-15
NetD10_2: D10.2 IC1.3 R37.2 | length 29.7
  Top Layer w0.381: D10.2@-14.425,-15 -14.425,-16.9 -13.525,-17.8 -13.525,-26.75 -11.625,-28.65 -2.15,-28.65 -1.621,-28.121 IC1.3@-1.621,-25.95
  Top Layer w0.508: R37.2@-14.8,-17.325 -14.425,-16.95 D10.2@-14.425,-15
NetLS1_2: LS1.2A Q1.3 | length 4.1
  Top Layer w0.508: LS1.2A@-37.64,-2.675 -37.64,-5.56 Q1.3@-36.775,-6.425
NetQ1_2: Q1.1 R17.1 | length 3
  Top Layer w0.254: Q1.1@-34.525,-7.375 -32.225,-7.375 R17.1@-31.75,-7.85
NetR2_1: R2.1 USB1.3 | length 3.8
  Top Layer w0.508: R2.1@61.025,17.75 61.025,17.375 62.166,16.234 USB1.3@63.991,16.234
NetR3_1: R3.1 USB1.2 | length 3
  Top Layer w0.508: R3.1@61.025,15.35 cw(c61.228,15.147) 61.228,15.434 USB1.2@63.991,15.434
OLEDCLK: MCU*1.62 OLED1.5 | length 59.9
  Top Layer w0.254: v3@28.125,7.125 28.125,6.925 29.725,5.325 MCU*1.62@31.2,5.325
  Bottom Layer w0.254: OLED1.5@-21.825,21.485 -15.06,21.485 -11.05,17.475 17.975,17.475 28.113,7.337 v3@28.113,7.125
  other v3: 28.15,7.125
OLEDCS: MCU*1.68 OLED1.1 | length 62.3
  Top Layer w0.254: v3@23.698,5.198 26.571,2.325 MCU*1.68@31.2,2.325
  Bottom Layer w0.254: OLED1.1@-21.825,11.325 -16.975,11.325 -12.97,15.33 17.412,15.33 23.625,9.117 v3(23.625,5.2)